# Altium PCB B PCB.PcbDoc
Units mm, origin at the board's own origin, x right, y up, seen from the top; angles counter-clockwise.
Board outline 26 x 22.43 mm, 2 copper layers (Top Layer, Bottom Layer); 17 components, 10 nets, 34 pads, 31 vias.
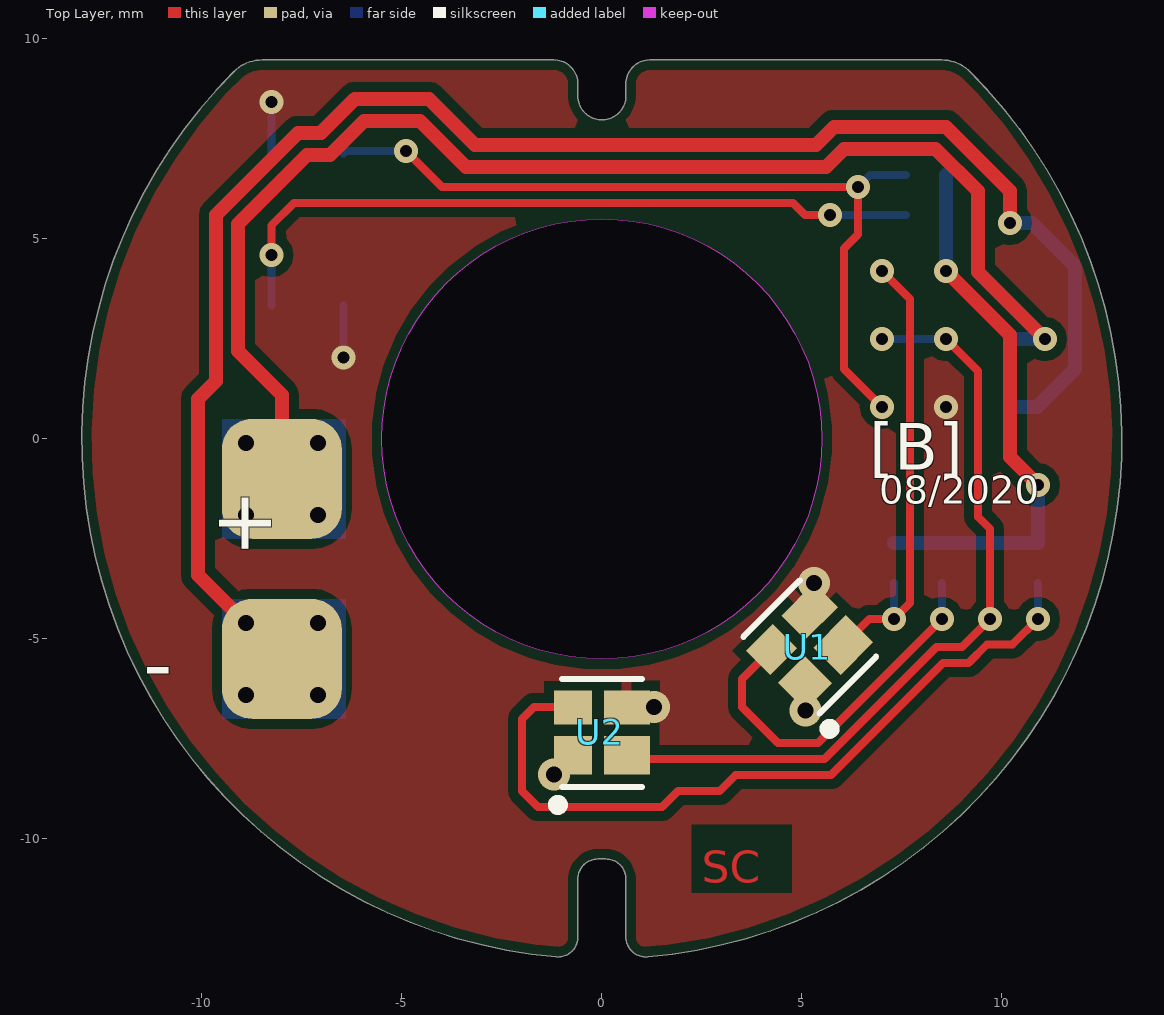
[diagram p0: Top Layer view]
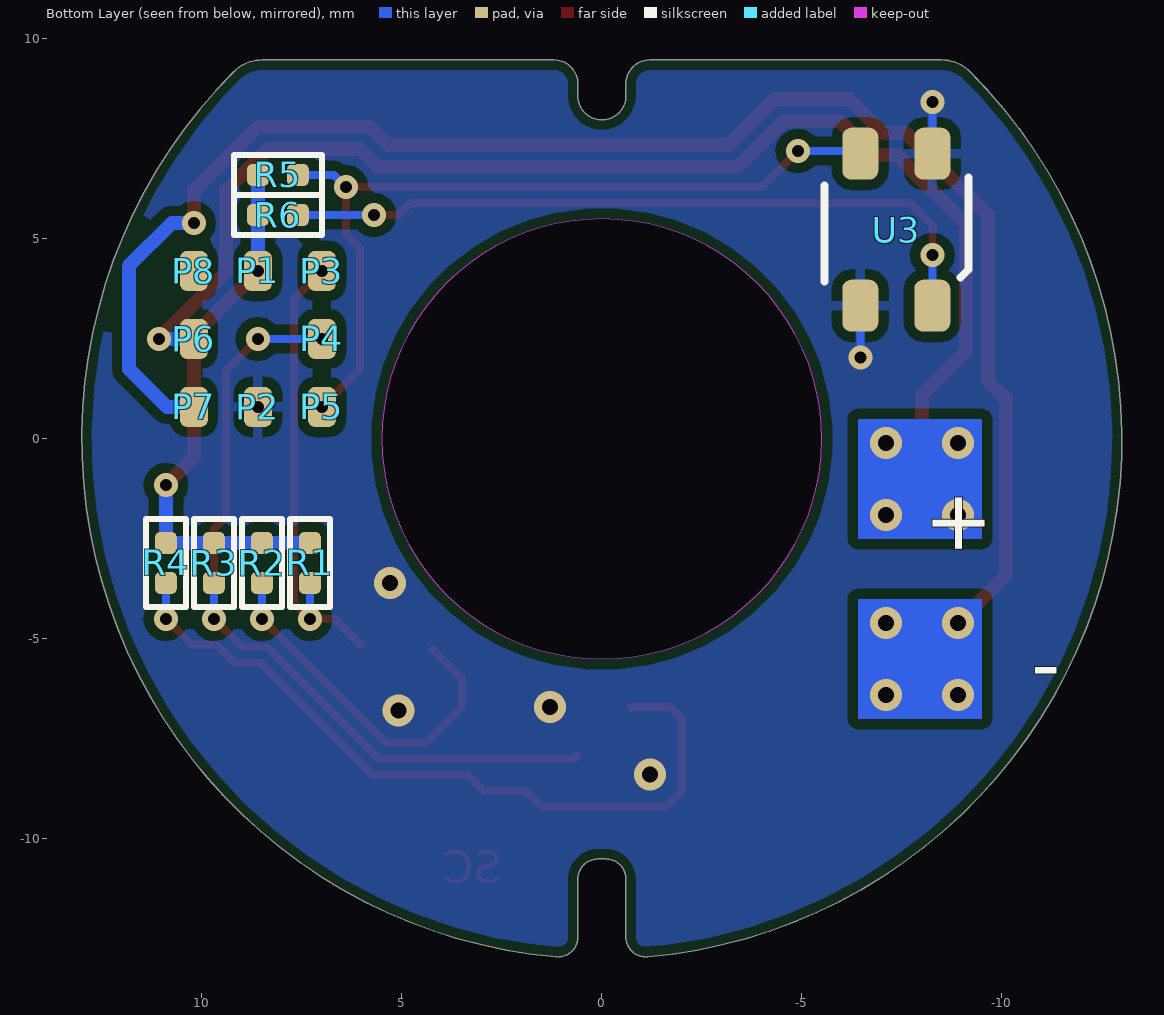
[diagram p1: Bottom Layer view, seen from below]
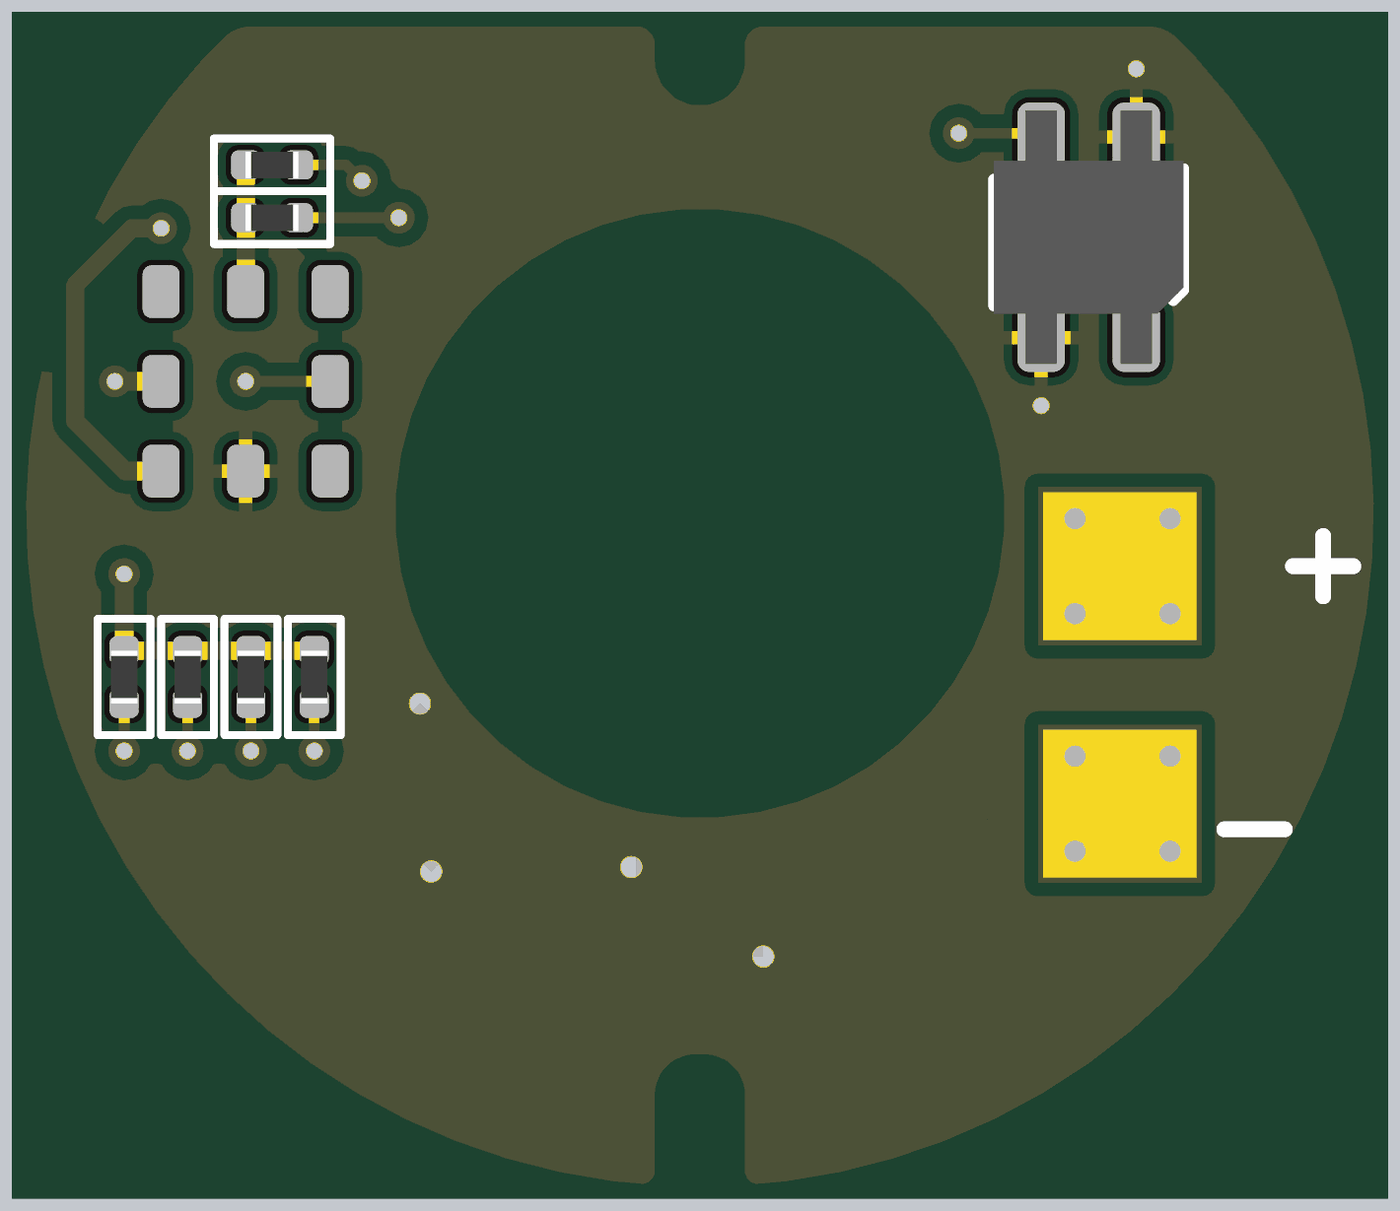
[diagram p2: 3D render of the assembled board from below, using the file's embedded part models]

## Layer stack, top to bottom
Top Solder: solder mask 0.0102, Solder Resist, Dk 3.5
Top Layer: signal copper 0.0356
Dielectric 1: dielectric 0.32, FR-4, Dk 4.8
Bottom Layer: signal copper 0.0356
Bottom Solder: solder mask 0.0102, Solder Resist, Dk 3.5

## Board outline
-1.144,-12.95 ccw(c-1.1,-12.452) -0.6,-12.452 -0.6,-11 cw(c-0.1,-11) -0.1,-10.5 0.1,-10.5 cw(c0.1,-11) 0.6,-11 0.6,-12.452 ccw(c1.1,-12.452) 1.144,-12.95 ccw(c0,0) 9.203,9.182 ccw(c8.495,8.476) 8.495,9.476 1.2,9.476 ccw(c1.2,8.876) 0.6,8.876 0.6,8.576 cw(c0,8.576) -0.6,8.576 -0.6,8.876 ccw(c-1.2,8.876) -1.2,9.476 -8.495,9.476 ccw(c-8.495,8.476) -9.203,9.182 ccw(c0,0)
cut-out: 0,-5.5 cw(c0,0) -5.5,0 cw(c0,0) 0,5.5 cw(c0,0) 5.5,0 cw(c0,0)

## Design rules (kind name [scope] priority, off if disabled: settings)
BoardOutlineClearance [All] p1: gap=0.25 ignorepadtopadclearanceinfootprint=FALSE
Clearance [All] p1: gap=0.25 ignorepadtopadclearanceinfootprint=FALSE except(0.2: Arc-Arc Arc-Track Arc-SMDPad Arc-THPad Arc-Via Arc-Text Arc-Hole Track-Track Track-SMDPad Track-THPad Track-Via Track-Text Track-Hole SMDPad-SMDPad SMDPad-THPad SMDPad-Via SMDPad-Text SMDPad-Hole THPad-THPad THPad-Via THPad-Text THPad-Hole Via-Via Via-Text Via-Hole Text-Text Text-Hole)
DiffPairsRouting [All] p1: maxlimit=0.5 minlimit=0.15 mostfreqgap=0.2 toplayer_minwidth=0.15 toplayer_maxwidth=1 toplayer_prefwidth=0.2 bottomlayer_minwidth=0.15 bottomlayer_maxwidth=1 bottomlayer_prefwidth=0.2 maxuncoupledlength=12.7
HoleSize [All] p1: absolutevalues=TRUE maxlimit=6 minlimit=0.025 maxpercent=80.000 minpercent=20.000
MinimumSolderMaskSliver [All] p1: minsoldermaskwidth=0
PlaneClearance [All] p1: clearance=0.5
PlaneConnect [All] p1: planeconnectstyle=Relief reliefexpansion=0.5 reliefentries=4 reliefconductorwidth=0.25 reliefairgap=0.25
PolygonConnect [All] p1: connectstyle=Relief reliefconductorwidth=0.25 reliefentries=4 polygonreliefangle="90 Angle" airgapwidth=0.25
RoutingVias [All] p1: holewidth=0.3 width=0.6 viastyle="Through Hole" minholewidth=0.3 minwidth=0.5 maxholewidth=0.6 maxwidth=7
SilkToSilkClearance [All] p1: silktosilkclearance=0
SilkToSolderMaskClearance [IsPad] p1: minsilkscreentomaskgap=0 clearancetoexposedcopper=TRUE
SolderMaskExpansion [All] p1: expansion=0.102 istentingtop=FALSE
Width [All] p1: maxlimit=20 minlimit=0.15 preferedwidth=0.2
23 further rules are at their usual default settings.

## Components (designator, comment, footprint, x,y, rotation, side; value= is the part's Value field where it differs from the comment)
P1 "PAD_4" PAD_0.5X1MM 8.6,4.2 r90 bottom
P2 "PAD_4" PAD_0.5X1MM 8.6,0.8 r90 bottom
P3 "PAD_4" PAD_0.5X1MM 7,4.2 r90 bottom
P4 "PAD_4" PAD_0.5X1MM 7,2.5 r90 bottom
P5 "PAD_4" PAD_0.5X1MM 7,0.8 r90 bottom
P6 "PAD_4" PAD_0.5X1MM 10.2,2.5 r90 bottom
P7 "PAD_4" PAD_0.5X1MM 10.2,0.8 r90 bottom
P8 "PAD_4" PAD_0.5X1MM 10.2,4.2 r90 bottom
R1 "2.7K" RESC0402X04N 7.3,-3.1 r90 bottom
R2 "2.7K" RESC0402X04N 8.5,-3.1 r90 bottom
R3 "2.7K" RESC0402X04N 9.7,-3.1 r90 bottom
R4 "2.7K" RESC0402X04N 10.9,-3.1 r90 bottom
R5 "2.7K" RESC0402X04N 8.1,6.6 r0 bottom
R6 "2.7K" RESC0402X04N 8.1,5.6 r0 bottom
U1 "VCNT2020" VCNT2020 5.197,-5.197 r135 top locked
U2 "VCNT2020" VCNT2020 0,-7.35 r90 top locked
U3 "QRE1113GR" QRE1113GR -7.36,5.23 r90 bottom locked

## Footprints (in the part's own frame and the unit in brackets; to place one, negate y for a bottom-side part, rotate by r counter-clockwise, add the part's x,y. Pads: shape width x height; smd on the part's side, far side on the other; paste and mask are expansions set on the pad)
PAD_0.5X1MM [mm]
  rrect50% 1x0.7 smd: 1(0,0)
QRE1113GR [mm]
  rrect50% 1.3x0.9 smd: 1(-1.9,-0.9) 2(1.9,-0.9) 3(1.9,0.9) 4(-1.9,0.9)
  silkscreen extent -1.3,-1.8 1.3,1.8, body extent -2.4,-1.8 2.4,1.8, height 1.71
RESC0402X04N [mm] "Chip Resistor, 2-Leads, Body 1.00x0.50mm, IPC Medium Density"
  rrect50% 0.55x0.55 smd: 1(-0.5,0) 2(0.5,0)
  silkscreen extent -1.1,-0.5 1.1,0.5, body extent -0.5,-0.25 0.5,0.25, height 0.35
VCNT2020 [mm] "4-SMD"
  rect 0.97x0.95 smd: 1(-0.56,0.725)
  rect 0.97x1.15 smd: 2(-0.56,-0.625)
  rect 0.85x0.95 smd: 3(0.63,0.725)
  rect 0.85x1.15 smd: 4(0.63,-0.625)
  silkscreen extent -1.92,-1 1.35,1.22, body extent -1.25,-1 1.25,1, height 0.81

## Part data
P1 P2 P3 P4 P5 P6 P7 P8: "a Rec pad, 0.5X1mm"
R1 R2 R3 R4 R5 R6: library part "RES 2.7K", "RES SMD 2.7K OHM 1% 1/16W 0402", Manufacturer=YAGEO, Manufacturer Part Number=AC0402FR-072K7L, Package / Case=0402, Supplier Part Number 1=C144771, Category=Resistors, Resistance=2.7K, Supplier 1=LCSC
U1 U2: "REFLECTIVE SENSOR WITH PTR OUTPU", Case="4-SMD Module", Manufacturer="Vishay Semiconductor Opto Division", Supplier Part Number 1=161-2156, Category="Optical Sensors", Manufacturer Part Number=VCNT2020, Supplier 1=RS
U3: "SENSOR OPTO TRANS REFL SMD PHOTO", Case="4-SMD Module", Manufacturer="ON Semiconductor", Category="Optical Sensors", Manufacturer Part Number=QRE1113GR

## Free pads (board coordinates)
  rrect50% 3x3 smd: 0(-8,-5.5) 0(-8,-1)

## Via types
v1: diameter 0.6, hole 0.3, Top Layer to Bottom Layer, tented both sides, 19 vias
v2: diameter 0.8, hole 0.4, Top Layer to Bottom Layer, 8 vias
v3: diameter 0.8, hole 0.4, Top Layer to Bottom Layer, tented both sides, 4 vias

## Nets (pads, with @x,y where several pads share a name; then routed paths per layer and width w, separated by ;. In a path a pad name is that pad's centre, name@x,y a point inside that pad or via, vN(x,y) a via of type N, cw(c..) or ccw(c..) an arc to the next point about the centre after c; other vN are vias at no path point)
3V3: P1.1 R1.2 R2.2 R3.2 R4.2 R5.2 R6.2 | length 13.8
  Top Layer w0.35: v1(8.6,4.2) 10.2,2.6 10.2,-0.45 v1(10.9,-1.15)
  Bottom Layer w0.35: R1.2 R2.2 R3.2 R4.2 v1(10.9,-1.15) ; v1(8.6,4.2) R5.2
B_GND: P2.1 U1.1 U1.4 U2.1 U2.4 U3.2 U3.4 | length 2.6
  Bottom Layer w0.2: U3.2 v1(-8.26,8.42) ; v1(-6.46,2.04) U3.4
  other v1: 8.6,0.8
  other v3: -1.2,-8.395 5.087,-6.784 1.3,-6.7 5.3,-3.602
GND: P7.1 pad.0@-8,-5.5 | length 40.8
  Top Layer w0.35: pad.0@-9,-4.7 -9,-4.5 -10.1,-3.4 -10.1,1 -9.65,1.45 -9.65,5.6 -7.6,7.65 -7.028,7.65 -6.178,8.5 -4.322,8.5 -3.172,7.35 5.35,7.35 5.8,7.8 8.6,7.8 10.2,6.2 v1(10.2,5.4)
  Bottom Layer w0.35: P7.1 10.875,0.8 11.825,1.75 11.825,4.296 11.805,4.345 10.751,5.4 v1(10.2,5.4)
  other v2: -8.9,-6.4 -7.1,-6.4 -8.9,-4.6 -7.1,-4.6
LD1: R2.1 U1.3 | length 9.3
  Top Layer w0.2: U1.3 3.5,-6.003 3.5,-6.7 4.4,-7.6 5.4,-7.6 v1(8.5,-4.5)
  Bottom Layer w0.2: v1(8.5,-4.5) R2.1
LD2: R4.1 U2.3 | length 19.1
  Top Layer w0.2: U2.3 -0.745,-6.7 -1.7,-6.7 -2,-7 -2,-8.8 -1.6,-9.2 1.5,-9.2 1.9,-8.8 2.944,-8.8 3.344,-8.4 5.731,-8.4 8.531,-5.6 9.166,-5.6 9.633,-5.133 10.267,-5.133 v1(10.9,-4.5)
  Bottom Layer w0.2: v1(10.9,-4.5) R4.1
LD3: R6.1 U3.1 | length 18.4
  Top Layer w0.2: v1(-8.26,4.6) -8.26,5.34 -7.7,5.9 4.781,5.9 5.081,5.6 v1(5.7,5.6) v1@5.9,5.6
  Bottom Layer w0.2: U3.1 v1(-8.26,4.6) ; v1(5.7,5.6) R6.1
S1: P3.1 R1.1 U1.2 | length 11.6
  Top Layer w0.2: U1.2 6.686,-4.5 v1(7.3,-4.5) 7.7,-4.1 7.7,3.5 v1(7,4.2)
  Bottom Layer w0.2: v1(7.3,-4.5) R1.1
S2: P4.1 R3.1 U2.2 | length 20.5
  Top Layer w0.2: U2.2 0.715,-8 5.566,-8 8.366,-5.2 9,-5.2 v1(9.7,-4.5) 9.7,-2.246 9.4,-1.946 9.4,1.7 v1(8.6,2.5)
  Bottom Layer w0.2: v1(7,2.5) v1(8.6,2.5) ; v1(9.7,-4.5) R3.1
S3: P5.1 R5.1 U3.3 | length 20.6
  Top Layer w0.2: v1(-4.9,7.2) -4,6.3 v1(6.4,6.3) 6.4,5.113 6.05,4.763 6.05,1.75 v1(7,0.8)
  Bottom Layer w0.2: U3.3 -6.39,7.2 v1(-4.9,7.2) ; v1(6.4,6.3) 6.7,6.6 R5.1
VIN: P6.1 pad.0@-8,-1 | length 32.8
  Top Layer w0.35: pad.0@-8,-1 -8,1.1 -9.1,2.2 -9.1,5.372 -7.372,7.1 -6.8,7.1 -5.95,7.95 -4.55,7.95 -3.4,6.8 5.6,6.8 6.05,7.25 8.345,7.25 9.4,6.195 9.4,4.178 11.075,2.503 v1(11.075,2.5)
  Bottom Layer w0.35: P6.1 v1(11.075,2.5)
  other v2: -8.9,-1.9 -7.1,-1.9 -8.9,-0.1 -7.1,-0.1
pads on no net: P8.1

## Polygon pours and split planes (outlines as drawn)
B_GND on Top Layer "B_GND_L01_P001" (solid, remove dead copper, pour order 1): -13,-13 -13,9.5 13.1,9.5 13.1,-13
B_GND on Bottom Layer "B_GND_L02_P002" (solid, remove dead copper, pour order 2): -13,-13 -13,9.5 13.1,9.5 13.1,-13

## Other copper
Top Layer:
  text "SC" at 2.5,-11.1 h0.8
Bottom Layer:
  rectangle net VIN: -9.5,-2.5 -6.4,0.5
  rectangle net GND: -9.5,-7 -6.4,-4

## Silkscreen, mask and mechanical layers (free items; w line width, h text height)
Top Overlay:
  text "[B]" at 6.68,-1.154 h2
  text "08/2020" at 6.939,-1.856 h1.2
  text "+" at -8.267,-2.966 h1.5 r90
  text "-" at -11.466,-6.35 h1.5
Bottom Overlay:
  text "+" at -8.267,-2.966 h1.5 r90
  text "-" at -11.466,-6.35 h1.5
Bottom Solder:
  rectangle: -9.4,-6.9 -6.5,-4.1
  rectangle: -9.4,-2.4 -6.5,0.4
Mechanical 1:
  circle w0.2: c0,0 r5.5
  lines w0.2: -9.203,9.182 ccw(c0,0) -1.144,-12.95 ccw(c-1.1,-12.452) -0.6,-12.452 -0.6,-11 cw(c-0.1,-11) -0.1,-10.5 0.1,-10.5 cw(c0.1,-11) 0.6,-11 0.6,-12.452 ccw(c1.1,-12.452) 1.144,-12.95 ccw(c0,0) 9.203,9.182 ccw(c8.495,8.476) 8.495,9.476 1.2,9.476 ccw(c1.2,8.876) 0.6,8.876 0.6,8.576 cw(c0,8.576) -0.6,8.576 -0.6,8.876 ccw(c-1.2,8.876) -1.2,9.476 -8.495,9.476 ccw(c-8.495,8.476) -9.203,9.182